# Altium PCB DCSupplyHub.PcbDoc
Units mm, origin at the board's own origin, x right, y up, seen from the top; angles counter-clockwise.
Board outline 81.6 x 57 mm, 2 copper layers (Top Layer, Bottom Layer), stack 1 mm thick; 118 components, 65 nets, 375 pads, 0 vias.
Unrouted connection lines stored in the file: 267.
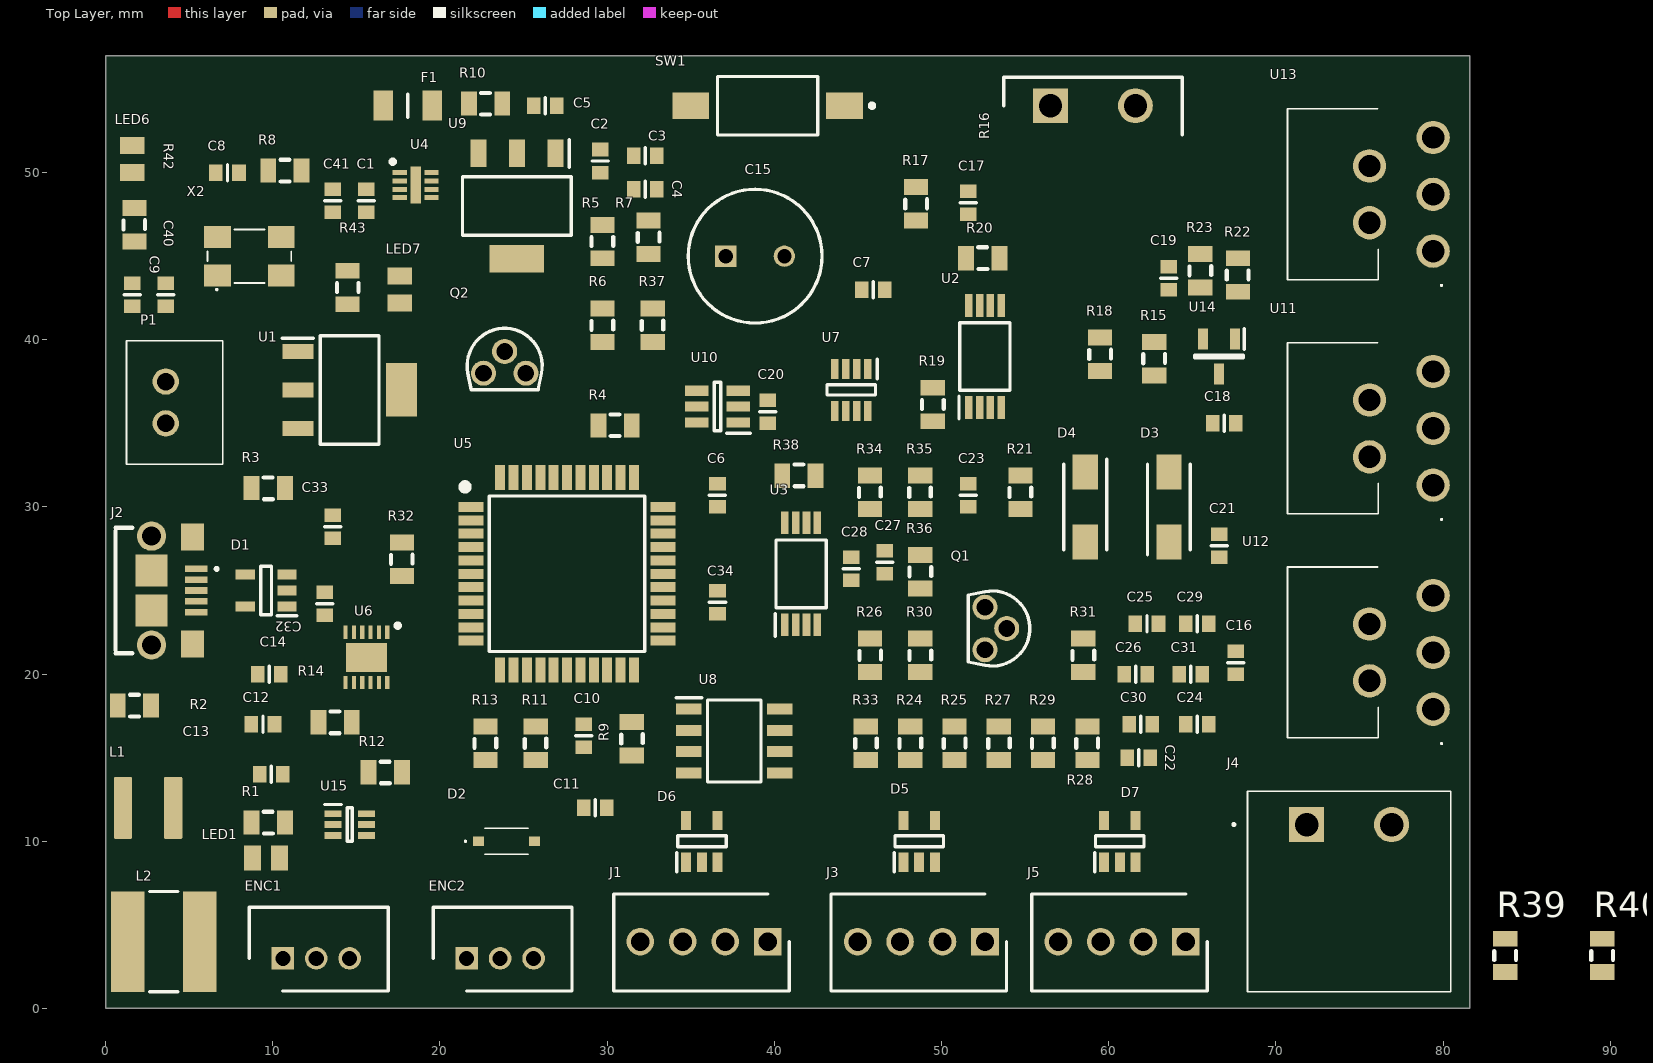
[diagram p0: Top Layer view]
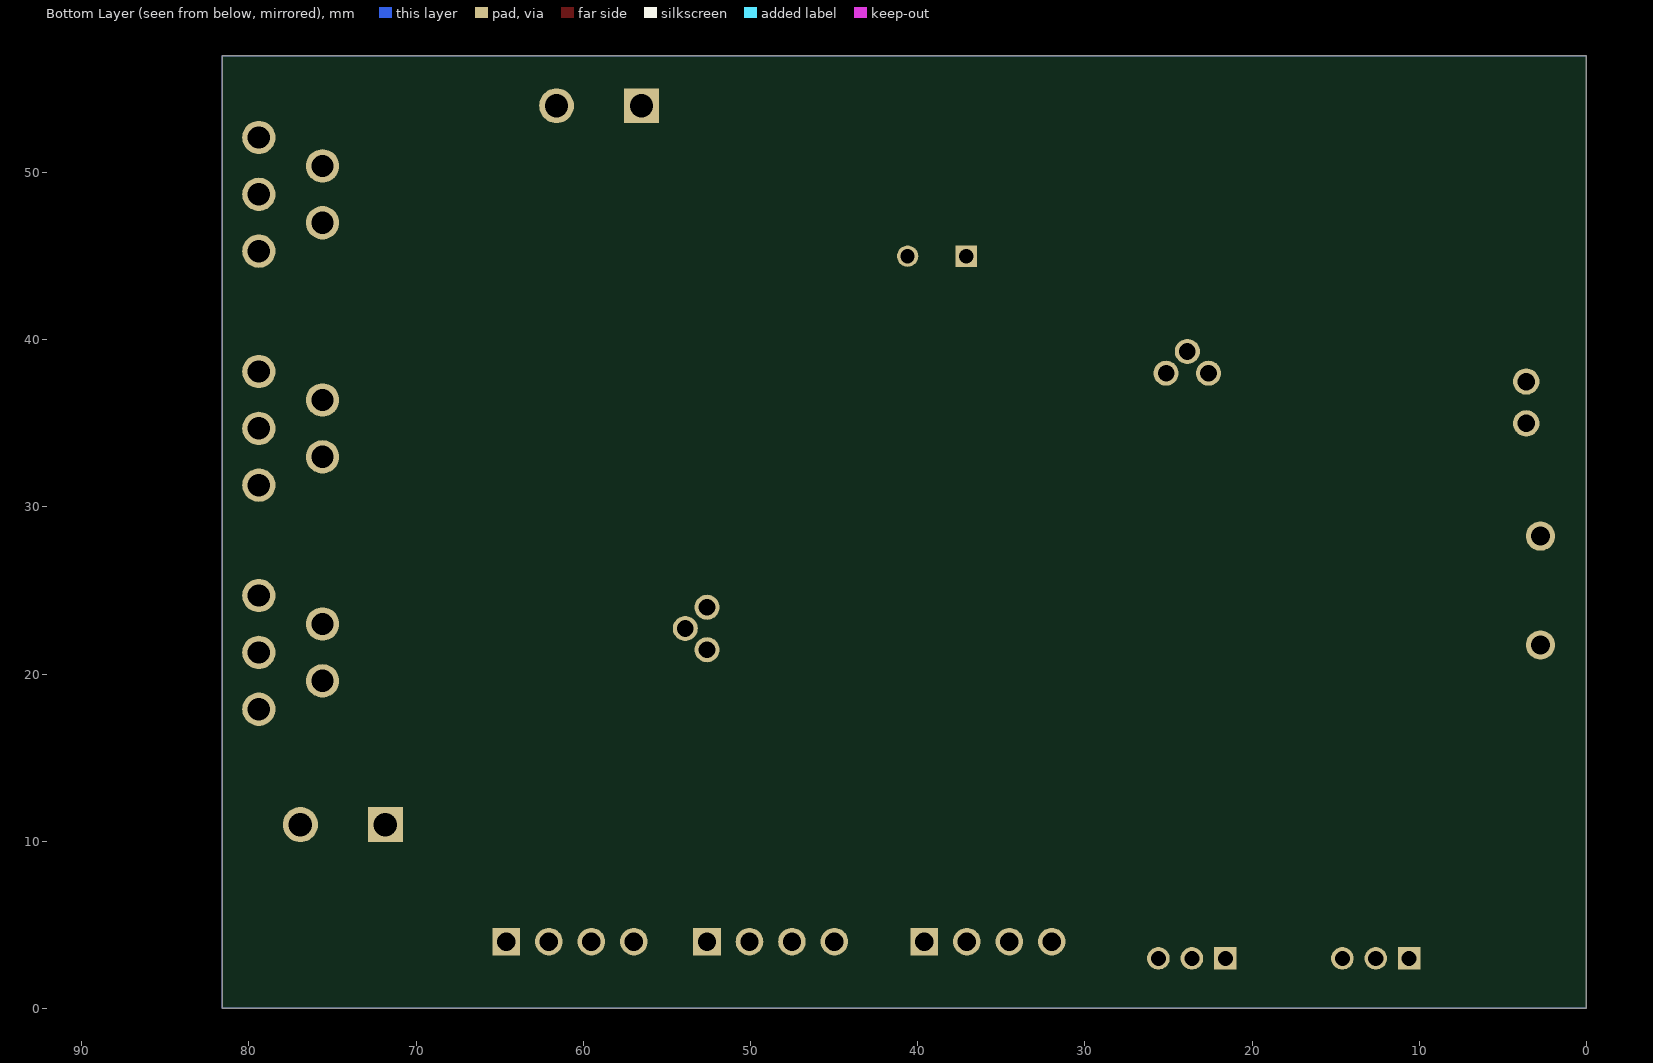
[diagram p1: Bottom Layer view, seen from below]

## Layer stack, top to bottom
Top Solder: solder mask 0.05, Solder Resist, Dk 4
Top Layer: signal copper 0.1
Dielectric 1: dielectric 0.8, FR-4, Dk 4.8
Bottom Layer: signal copper 0.1
Bottom Solder: solder mask 0.05, Solder Resist, Dk 4

## Board outline
0,0 81.6,0 81.6,57 0,57

## Design rules (kind name [scope] priority, off if disabled: settings)
AcuteAngle [All] p1: minimum=6.00000000000000E+0001 checktracksonly=FALSE
Clearance [All] p1: gap=0.2 ignorepadtopadclearanceinfootprint=TRUE
HoleSize [All] p1: absolutevalues=TRUE maxlimit=20 minlimit=0.15 maxpercent=80.000 minpercent=20.000
MinimumAnnularRing [All] p1: minimumring=0.125
MinimumSolderMaskSliver [All] p1: minsoldermaskwidth=0.15
PlaneConnect [All] p1: planeconnectstyle=Direct reliefexpansion=0.508 reliefentries=4 reliefconductorwidth=0.254 reliefairgap=0.254
PolygonConnect [All] p1: connectstyle=Direct reliefconductorwidth=0.254 reliefentries=4 polygonreliefangle="90 Angle" airgapwidth=0.254
RoutingVias [All] p1: holewidth=0.3 width=0.6 viastyle="Through Hole" minholewidth=0.2 minwidth=0.45 maxholewidth=10 maxwidth=5
SMDNeckDown [All] p1: percent=50.000
SilkToSolderMaskClearance [IsPad] p1: minsilkscreentomaskgap=0 clearancetoexposedcopper=TRUE
SolderMaskExpansion [All] p1: expansion=0.05 istentingtop=FALSE
UnRoutedNet [All] p1: checkbadconnections=TRUE
Width [All] p1: maxlimit=5 minlimit=0.1 preferedwidth=0.2 bottomlayer_minwidth=0.15 minimp=50.000000 maximp=50.000000 favimp=50.000000
25 further rules are at their usual default settings.

## Classes and differential pairs
component class PWM-DAC-PSU: C15 C16 C17 C18 C19 C20 C21 C22 C23 C24 C25 C26 C27 C28 C29 C30 C31 D3 D4 Q1 Q2 R15 R16 R17 R18 R19 R20 R21 R22 R23 R24 R25 R26 R27 R28 R29 R30 R31 R32 R33 R34 R35 R36 R37 R38 U2 U3 U7 U8 U10 U11 U12 U13 U14
component class DCDC-EPOT: C10 C11 C12 C13 C14 D2 L2 R11 R12 R13 R14 U6 U15

## Components (designator, comment, footprint, x,y, rotation, side; value= is the part's Value field where it differs from the comment)
C1 "Cap" Cap_0603 15.6,47.497 r270 top value=100nF
C2 "Cap" Cap_0603 29.6,51.503 r90 top value=100nF
C3 "Cap" Cap_0603 33.103,51 r0 top value=100nF
C4 "Cap" Cap_0603 33.103,49 r0 top value=100nF
C5 "Cap" Cap_0603 25.477,54 r180 top value=100nF
C6 "Cap" Cap_0603 36.6,31.503 r90 top value=100nF
C7 "Cap" Cap_0603 45.097,43 r180 top value=22uF
C8 "Cap" Cap_0603 8.103,50 r0 top value=10uF
C9 "Cap" Cap_0603 1.6,41.877 r270 top value=10uF
C10 "Cap" Cap_0603 28.6,17.123 r90 top value=2u2
C11 "Cap" Cap_0603 30.103,12 r0 top value=22uF
C12 "Cap" Cap_0603 8.6,17 r180 top value=100nF
C13 "Cap" Cap_0603 9.097,14 r180 top value=100nF
C14 "Cap" Cap_0603 10.6,20 r0 top value=22uF
C15 "35V 220uF" CAPPRD350W65D800H1300 37.1,45 r0 top
C16 "Cap" Cap_0603 67.6,19.877 r270 top value=100nF
C17 "Cap" Cap_0603 51.6,49 r90 top value=100nF
C18 "Cap" Cap_0603 66.097,35 r180 top value=100nF
C19 "Cap" Cap_0603 63.6,42.877 r270 top value=22uF
C20 "Cap" Cap_0603 39.6,34.877 r270 top value=100nF
C21 "Cap" Cap_0603 66.6,28.503 r90 top value=100nF
C22 "Cap" Cap_0603 62.6,15 r0 top value=100nF
C23 "Cap" Cap_0603 51.6,31.503 r90 top value=?uF
C24 "Cap" Cap_0603 66.103,17 r0 top value=10uF
C25 "Cap" Cap_0603 63.103,23 r0 top value=100nF
C26 "Cap" Cap_0603 60.797,20 r180 top value=100nF
C27 "Cap" Cap_0603 46.6,25.877 r270 top value=?uF
C28 "Cap" Cap_0603 44.6,25.497 r270 top value=?uF
C29 "Cap" Cap_0603 66.103,23 r0 top value=10uF
C30 "Cap" Cap_0603 61.097,17 r180 top value=100nF
C31 "Cap" Cap_0603 64.097,20 r180 top value=10uF
C32 "Cap" Cap_0603 13.1,23.397 r270 top value=100nF
C33 "Cap" Cap_0603 13.6,28 r270 top value=10uF
C34 "Cap" Cap_0603 36.6,23.497 r270 top value=10uF
C40 "Cap" Cap_0603 3.6,43.503 r90 top value=22pF
C41 "Cap" Cap_0603 13.6,49.123 r90 top value=22pF
D1 "CM1223-02SO" SOT95P280X145-5N 9.6,25 r180 top
D2 "BAT48ZFILM" BAT48ZFILM 23.974,10 r0 top
D3 "SK33A_R3G" DIOM5126X250N 63.6,30 r90 top
D4 "SK33A_R3G" DIOM5126X250N 58.6,30 r270 top
D5 "CM1223-02SO" SOT95P280X145-5N 48.665,10 r90 top
D6 "CM1223-02SO" SOT95P280X145-5N 35.665,10 r90 top
D7 "CM1223-02SO" SOT95P280X145-5N 60.665,10 r90 top
ENC1 "440054-3" SHDR3W50P0X200_1X3_800X470X635P 10.6,3 r0 top
ENC2 "440054-3" SHDR3W50P0X200_1X3_800X470X635P 21.6,3 r0 top
F1 "0685P9500-01" FUSC3216X83N 18.07,54 r180 top
J1 "61900411121" SHDR4W64P0X254_1X4_1020X580X1175P 39.6,4 r180 top
J2 "2013499-1" 2013499-1 0.6,25 r270 top
J3 "61900411121" SHDR4W64P0X254_1X4_1020X580X1175P 52.6,4 r180 top
J4 "1757242" 1757242 71.839,11 r0 top
J5 "61900411121" SHDR4W64P0X254_1X4_1020X580X1175P 64.6,4 r180 top
L1 "74404042330" "WE-LQS 4018" 2.541,12 r180 top value=33µH
L2 "SRN6045-2R2Y" SRN6045_1 3.473,4 r0 top
LED1 "Check Fuse" LED_SMD_0805_R 9.6,9 r180 top
LED6 "" LED_SMD_0805_R 1.6,50.81 r90 top
LED7 "GREEN" LED_SMD_0805_R 17.6,43 r90 top
P1 "B2B-XH-2__LF__SN_" B2BXH2LFSN 3.6,37.5 r270 top
Q1 "2N3904" LM431ACZ 52.6,24 r270 top
Q2 "2N3904" LM431ACZ 22.6,38 r0 top
R1 "Res1" RES_0805 9.6,11 r90 top value=18k
R2 "Res1" RES_0805 1.6,18 r90 top value=22K
R3 "Res1" RES_0805 9.6,31 r90 top value=22K
R4 "Res1" RES_0805 30.6,35 r270 top value=10k
R5 "Res1" RES_0805 29.6,46 r0 top value=33k
R6 "Res1" RES_0805 29.6,41 r0 top value=10k
R7 "Res1" RES_0805 32.6,46 r180 top value=18k
R8 "Res1" RES_0805 10.6,50 r90 top value=12k
R9 "Res1" RES_0805 31.6,16 r180 top value=18k
R10 "Res1" RES_0805 22.6,54 r90 top value=12k
R11 "Res1" RES_0805 25.6,16 r0 top value=10k
R12 "Res1" RES_0805 16.6,14 r90 top value=850R
R13 "Res1" RES_0805 22.6,16 r0 top value=2k2
R14 "Res1" RES_0805 13.6,17 r90 top value=10k
R15 "Res1" RES_0805 62.6,39 r0 top value="18k 0.1%"
R16 "PWR221T-30-1R00F" TO508P343X1041X1930-2P 56.52,54 r0 top
R17 "Res1" RES_0805 48.6,48 r180 top value=22k
R18 "Res1" RES_0805 59.6,39 r180 top value="18k 0.1%"
R19 "Res1" RES_0805 49.6,36 r180 top value=22k
R20 "Res1" RES_0805 52.6,45 r270 top value="18k 0.1%"
R21 "Res1" RES_0805 54.6,31 r0 top value="18k 0.1%"
R22 "Res1" RES_0805 67.6,44 r0 top value=10k
R23 "Res1" RES_0805 65.6,44 r180 top value=22k
R24 "Res1" RES_0805 48.251,15.746 r180 top value=100R
R25 "Res1" RES_0805 50.902,15.746 r180 top value="18k 0.1%"
R26 "Res1" RES_0805 45.854,21 r180 top value="1k 0.1%"
R27 "Res1" RES_0805 53.552,15.746 r180 top value="18k 0.1%"
R28 "Res1" RES_0805 58.6,16 r0 top value="18k 0.1%"
R29 "Res1" RES_0805 55.949,16 r0 top value="18k 0.1%"
R30 "Res1" RES_0805 48.854,21 r180 top value=1k
R31 "Res1" RES_0805 58.6,21 r180 top value=100R
R32 "Res1" RES_0805 17.6,27 r0 top value=1k
R33 "Res1" RES_0805 45.6,15.746 r180 top value=1k
R34 "Res1" RES_0805 45.6,31 r0 top value=1k
R35 "Res1" RES_0805 48.6,31 r0 top value=1k
R36 "Res1" RES_0805 48.854,26 r180 top value=1k
R37 "Res1" RES_0805 32.6,41 r0 top value=10k
R38 "Res1" RES_0805 41.6,32 r270 top value=1k
R39 "Res1" RES_0805 83.6,3.3 r0 top value=4.7k
R40 "Res1" RES_0805 89.4,3.3 r0 top value=4.7k
R42 "Res1" RES_0805 1.6,47 r0 top value=150R
R43 "Res1" RES_0805 14.6,43 r180 top value=65R
SW1 "EVQQ2D03W" TECO-FSMSMTR_V 39.6,54 r180 top
U1 "AZ1117IH-3.3TRG1" SOT230P700X180-4N 14.6,37 r0 top
U2 "LM358FV-GE2" SOP65P640X135-8N 52.6,39 r90 top
U3 "LM358FV-GE2" SOP65P640X135-8N 41.6,26 r90 top
U4 "LTC4365CDDB#PBF" SON50P200X300X80-9N-D 18.55,49.25 r0 top
U5 "" QFP80P1200X1200X120-44N 27.6,26 r0 top
U6 "MIC2253-06YML" SON50P300X300X90-13N-D 15.6,21 r270 top
U7 "INA219BIDCNT" SOT65P280X145-8N 44.6,37 r270 top
U8 "LM334M_NOPB" SOIC127P600X175-8N 37.6,16 r0 top
U9 "LD1117S50TR" SOT230P700X190-4N 24.6,48 r270 top
U10 "MCP4726" SOT95P270X145-6N 36.6,36 r180 top
U11 "LT3080ET#31PBF" LT3080ET31PBF 79.41,31.3 r90 top
U12 "LT3080ET#31PBF" LT3080ET31PBF 79.41,17.9 r90 top
U13 "LT3080ET#31PBF" LT3080ET31PBF 79.41,45.3 r90 top
U14 "MAX6018AEUR18+T" SOT95P237X112-3N 66.6,39 r270 top
U15 "MCP4017T-103E_LT" SOT65P210X110-6N 14.6,11 r0 top
X2 "ABM3C-16.000MHZ-D4Y-T" ABM3C16000MHZD4YT 8.6,45 r0 top

## Footprints (in the part's own frame and the unit in brackets; to place one, negate y for a bottom-side part, rotate by r counter-clockwise, add the part's x,y. Pads: shape width x height; smd on the part's side, far side on the other; paste and mask are expansions set on the pad)
1757242 [mm]
  rect 2.1x2.1 hole 1.4: 1(0,0)
  round 2.1 hole 1.4: 2(5.08,0)
  silkscreen extent -4.4,-10 8.62,2, body extent -3.58,-10 8.58,2, height 8.89
2013499-1 [mm]
  rect 0.4x1.35 smd: 1(-1.3,4.825) 2(-0.65,4.825) 3(0,4.825) 4(0.65,4.825) 5(1.3,4.825)
  rect 1.6x1.4 smd: 6(-3.2,4.6) 7(3.2,4.6)
  rect 1.9x1.9 smd: 8(-1.2,2.15) 9(1.2,2.15)
  round 1.75 hole 1.15: 10(-3.255,2.15) 11(3.255,2.15)
  silkscreen extent -3.75,0 3.75,6.09, body extent -3.97,-0.56 4.03,5.04, height 2.68
ABM3C16000MHZD4YT [mm]
  rect 1.6x1.3 smd: 1(-1.9,-1.15) 2(1.9,-1.15) 3(1.9,1.15) 4(-1.9,1.15)
  silkscreen extent -2.5,-2.05 2.5,1.6, body extent -2.57,-1.67 2.57,1.67, height 1.4
B2BXH2LFSN [mm]
  round 1.575 hole 1.05: 1(0,0) 2(2.5,0)
  silkscreen extent -2.45,-2.35 4.95,3.4, body extent -2.45,-3.36 4.95,3.39, height 7.01
BAT48ZFILM [mm]
  rect 0.65x0.57 smd: 1(-1.675,0) 2(1.675,0)
  silkscreen extent -2.5,-0.78 1.3,0.77, body extent -1.94,-0.77 1.94,0.77, height 1.55
Cap_0603 [mm]
  rect 0.81x0.99 smd: 1(-1.503,0) 2(-0.123,0)
  silkscreen extent -0.81,-0.48 -0.81,0.48, body extent -1.63,-0.41 0,0.41, height 0.95
CAPPRD350W65D800H1300 [mm]
  rect 1.275x1.275 hole 0.85: 1(0,0)
  round 1.275 hole 0.85: 2(3.5,0)
  silkscreen extent -2.25,-4 5.75,4, body extent -2.49,-4.25 6,4.25, height 13
DIOM5126X250N [mm]
  rect 2.1x1.5 smd: 1(-2.1,0) 2(2.1,0)
  silkscreen extent -2.85,-1.28 2.57,1.28, body extent -2.57,-1.28 2.57,1.28, height 2.5
FUSC3216X83N [mm]
  rect 1.17x1.8 smd: 1(-1.47,0) 2(1.47,0)
  silkscreen extent 0,-0.69 0,0.69
LED_SMD_0805_R [mm]
  rect 1.02x1.47 smd: 1(-0.81,0) 2(0.81,0)
  body extent -1,-0.62 1,0.63, height 1.1
LM431ACZ [mm]
  round 1.5 hole 1: 1(0,0) 2(1.27,1.3) 3(2.54,0)
  silkscreen extent -0.97,-1 3.51,2.68, body extent -1.39,-1.64 3.93,2.55, height 6.11
LT3080ET31PBF [mm]
  round 1.995 hole 1.33: 1(0,0) 2(1.7,3.81) 3(3.4,0) 4(5.1,3.81) 5(6.8,0)
  silkscreen extent -2.1,-0.55 8.51,8.71, body extent -1.71,-0.56 8.51,8.71, height 15.85
QFP80P1200X1200X120-44N [mm]
  rect 1.5x0.6 smd: 1(-5.75,4) 2(-5.75,3.2) 3(-5.75,2.4) 4(-5.75,1.6) 5(-5.75,0.8) 6(-5.75,0) 7(-5.75,-0.8) 8(-5.75,-1.6) 9(-5.75,-2.4) 10(-5.75,-3.2) 11(-5.75,-4) 23(5.75,-4) 24(5.75,-3.2) 25(5.75,-2.4) 26(5.75,-1.6) 27(5.75,-0.8) 28(5.75,0) 29(5.75,0.8) 30(5.75,1.6) 31(5.75,2.4) 32(5.75,3.2) 33(5.75,4)
  rect 0.6x1.5 smd: 12(-4,-5.75) 13(-3.2,-5.75) 14(-2.4,-5.75) 15(-1.6,-5.75) 16(-0.8,-5.75) 17(0,-5.75) 18(0.8,-5.75) 19(1.6,-5.75) 20(2.4,-5.75) 21(3.2,-5.75) 22(4,-5.75) 34(4,5.75) 35(3.2,5.75) 36(2.4,5.75) 37(1.6,5.75) 38(0.8,5.75) 39(0,5.75) 40(-0.8,5.75) 41(-1.6,5.75) 42(-2.4,5.75) 43(-3.2,5.75) 44(-4,5.75)
  silkscreen extent -6.3,-4.65 4.65,5.4
RES_0805 [mm]
  rect 1.45x0.95 smd: 1(0.127,-1.127) 2(0.127,0.873)
  silkscreen extent -0.53,-0.4 0.76,0.14, body extent -0.5,-1.15 0.75,0.9, height 0.5
SHDR3W50P0X200_1X3_800X470X635P [mm]
  rect 1.35x1.35 hole 0.9: 1(0,0)
  round 1.35 hole 0.9: 2(2,0) 3(4,0)
  silkscreen extent -2,-1.95 6.3,3.05, body extent -1.91,-1.6 6.09,3.1, height 6.05
SHDR4W64P0X254_1X4_1020X580X1175P [mm]
  rect 1.65x1.65 hole 1.1: 1(0,0)
  round 1.65 hole 1.1: 2(2.54,0) 3(5.08,0) 4(7.62,0)
  silkscreen extent -1.29,-2.85 9.21,2.95, body extent -1.29,-2.9 8.91,2.9, height 11.75
SOIC127P600X175-8N [mm]
  rect 1.525x0.65 smd: 1(-2.712,1.905) 2(-2.712,0.635) 3(-2.712,-0.635) 4(-2.712,-1.905) 5(2.712,-1.905) 6(2.712,-0.635) 7(2.712,0.635) 8(2.712,1.905)
  silkscreen extent -3.47,-2.45 1.6,2.58, body extent -3,-2.45 3,2.45, height 1.75
SON50P200X300X80-9N-D [mm]
  rect 0.85x0.3 smd: 1(-0.95,0.75) 2(-0.95,0.25) 3(-0.95,-0.25) 4(-0.95,-0.75) 5(0.95,-0.75) 6(0.95,-0.25) 7(0.95,0.25) 8(0.95,0.75)
  rect 0.61x2.2 smd: 9(0,0)
  silkscreen extent -1.5,1.28 -1.25,1.52, body extent -1.05,-1.5 1.05,1.5, height 0.8
SON50P300X300X90-13N-D [mm]
  rect 0.8x0.25 smd: 1(-1.5,1.25) 2(-1.5,0.75) 3(-1.5,0.25) 4(-1.5,-0.25) 5(-1.5,-0.75) 6(-1.5,-1.25) 7(1.5,-1.25) 8(1.5,-0.75) 9(1.5,-0.25) 10(1.5,0.25) 11(1.5,0.75) 12(1.5,1.25)
  rect 1.75x2.45 smd: 13(0,0)
  silkscreen extent -2.02,1.75 -1.78,2, body extent -1.55,-1.5 1.55,1.5, height 0.9
SOP65P640X135-8N [mm]
  rect 1.35x0.45 smd: 1(-3.05,0.975) 2(-3.05,0.325) 3(-3.05,-0.325) 4(-3.05,-0.975) 5(3.05,-0.975) 6(3.05,-0.325) 7(3.05,0.325) 8(3.05,0.975)
  silkscreen extent -3.72,-1.5 2.03,1.55, body extent -3.2,-1.5 3.2,1.5, height 1.35
SOT65P210X110-6N [mm]
  rect 1x0.4 smd: 1(-1,0.65) 2(-1,0) 3(-1,-0.65) 4(1,-0.65) 5(1,0) 6(1,0.65)
  silkscreen extent -1.5,-1 0.15,1.2, body extent -1.05,-1 1.05,1, height 1.1
SOT65P280X145-8N [mm]
  rect 1.2x0.45 smd: 1(-1.25,0.975) 2(-1.25,0.325) 3(-1.25,-0.325) 4(-1.25,-0.975) 5(1.25,-0.975) 6(1.25,-0.325) 7(1.25,0.325) 8(1.25,0.975)
  silkscreen extent -1.85,-1.45 0.3,1.55, body extent -1.41,-1.45 1.41,1.45, height 1.3
SOT95P237X112-3N [mm]
  rect 1.25x0.6 smd: 1(-1.05,0.95) 2(-1.05,-0.95) 3(1.05,0)
  silkscreen extent -1.67,-1.46 0.08,1.5, body extent -1.27,-1.46 1.27,1.46, height 1
SOT95P270X145-6N [mm]
  rect 1.4x0.6 smd: 1(-1.25,0.95) 2(-1.25,0) 3(-1.25,-0.95) 4(1.25,-0.95) 5(1.25,0) 6(1.25,0.95)
  silkscreen extent -1.95,-1.45 0.2,1.6, body extent -1.35,-1.45 1.35,1.45, height 1.45
SOT95P280X145-5N [mm]
  rect 1.15x0.6 smd: 1(-1.25,0.95) 2(-1.25,0) 3(-1.25,-0.95) 4(1.25,-0.95) 5(1.25,0.95)
  silkscreen extent -1.83,-1.45 0.32,1.5, body extent -1.4,-1.45 1.4,1.45, height 1.45
SOT230P700X180-4N [mm]
  rect 1.85x0.9 smd: 1(-3.1,2.3) 2(-3.1,0) 3(-3.1,-2.3)
  rect 1.85x3.2 smd: 4(3.1,0)
  silkscreen extent -4.03,-3.25 1.75,3.25
SOT230P700X190-4N [mm]
  rect 1.65x0.95 smd: 1(-3.15,2.3) 2(-3.15,0) 3(-3.15,-2.3)
  rect 1.65x3.25 smd: 4(3.15,0)
  silkscreen extent -3.98,-3.25 1.75,3.25, body extent -3.5,-3.25 3.5,3.25, height 1.9
SRN6045_1 [mm]
  rect 2.01x6 smd: 1(-2.15,0) 2(2.15,0)
  silkscreen extent -0.85,-3 0.85,3, body extent -3,-3 3,3, height 4.5
TECO-FSMSMTR_V [mm] "SMD, 2-Leads, Body 6x3.5mm, Pitch 9.19mm"
  rect 2.2x1.6 smd: 1(-4.595,0)
  rect 2.18x1.6 smd: 2(4.595,0)
  silkscreen extent -6.37,-1.75 3,1.75, body extent -4.98,-1.75 4.98,1.75, height 4.4
TO508P343X1041X1930-2P [mm]
  rect 2.085x2.085 hole 1.39: 1(0,0)
  round 2.085 hole 1.39: 2(5.08,0)
  silkscreen extent -2.79,-1.73 7.87,1.7, body extent -2.67,-1.73 7.75,1.7, height 18.8
"WE-LQS 4018" [mm] "SMD Power Inductor, 2-Leads, Body 4.0x4.0mm"
  rrect15% 1.1x3.7 smd: 1(-1.5,0) 2(1.5,0)
  body extent -2,-2 2,2, height 1.78

## Part data
C1 C2 C3 C4 C5 C6 C7 C8 C9 C10 C11 C12 C13 C14 C16 C17 C18 C19 C20 C21 C22 C23 C24 C25 C26 C27 C28 C29 C30 C31 C32 C33 C34 C40 C41: "Capacitor", LatestRevisionDate=17-Jul-2002, LatestRevisionNote="Re-released for DXP Platform.", PackageDescription="Radial Cap, Thru-Hole; 2 Leads; 0.3 in Pin Spacing", PackageReference=RAD-0.3, Published=8-Jun-2000, Publisher="Altium Limited"
C15: library part EEU-FR1V221BJ, "Capacitor Polarised", Manufacturer_Name=Panasonic, Mouser Part Number=667-EEU-FR1V221BJ, Arrow Part Number=EEU-FR1V221BJ, Arrow Price/Stock=https://www.arrow.com/en/products/eeufr1v221bj/panasonic?region=nac, Datasheet Link=https://www.farnell.com/datasheets/3629148.pdf, Height=13mm, Manufacturer_Part_Number=EEU-FR1V221BJ, Mouser Price/Stock=https://www.mouser.co.uk/ProductDetail/Panasonic/EEU-FR1V221BJ?qs=f9yNj16SXrJlLopqn4QBkw%3D%3D
D1 D5 D6 D7: "TVS Diode (Uni-directional)", Manufacturer_Name=onsemi, Mouser Part Number=748-CM1223-02SO, Datasheet Link=https://www.onsemi.com/pdf/datasheet/cm1223-d.pdf, Height=1.45mm, Manufacturer_Part_Number=CM1223-02SO, Mouser Price/Stock=https://www.mouser.co.uk/ProductDetail/onsemi/CM1223-02SO?qs=lLuKAerq7nnvVg3rEtIojA%3D%3D
D2: "Schottky Diode", Manufacturer_Name=STMicroelectronics, Mouser Part Number=511-BAT48ZFILM, Arrow Part Number=BAT48ZFILM, Arrow Price/Stock=https://www.arrow.com/en/products/bat48zfilm/stmicroelectronics?region=europe, Datasheet Link=https://altium.componentsearchengine.com/Datasheets/2/BAT48ZFILM.pdf, Height=1.45mm, Manufacturer_Part_Number=BAT48ZFILM, Mouser Price/Stock=https://www.mouser.co.uk/ProductDetail/STMicroelectronics/BAT48ZFILM?qs=jZi1jxfVU97drMZAC9JWhA%3D%3D
D3 D4: "Schottky Diode", Manufacturer_Name="Taiwan Semiconductor", Manufacturer_Part_Number="SK33A R3G", Mouser Part Number=821-SK33AR3G, Datasheet Link=https://eu.mouser.com/datasheet/2/395/SK32A%20SERIES_T1705-1140381.pdf, Height=2.5mm, Mouser Price/Stock=https://www.mouser.co.uk/ProductDetail/Taiwan-Semiconductor/SK33A-R3G?qs=u4fy%2FsgLU9MRgnm6RX6lAA%3D%3D
ENC1 ENC2: "Connector", Manufacturer_Name="TE Connectivity", Mouser Part Number=571-440054-3, Arrow Part Number=440054-3, Arrow Price/Stock=https://www.arrow.com/en/products/440054-3/te-connectivity?region=nac, ComponentLink1Description="Encoder Datasheet", ComponentLink1URL=https://www.farnell.com/datasheets/3750970.pdf, Datasheet Link=https://www.te.com/commerce/DocumentDelivery/DDEController?Action=srchrtrv&DocNm=440054&DocType=Customer+Drawing&DocLang=English&DocFormat=pdf&PartCntxt=440054-3, Height=6.35mm, Manufacturer_Part_Number=440054-3, Mouser Price/Stock=https://www.mouser.co.uk/ProductDetail/TE-Connectivity/440054-3?qs=JFPmFzpscO5ATC%252BmN3ka1Q%3D%3D
F1: "Fuse Chip Fast Acting 50A 32V SMD Solder Pad 1206 3.2 X 1.58 X 0.63mm Ceramic T/R", Manufacturer_Name="Bel Circuit Protection", Arrow Part Number=0685P9500-01, Arrow Price/Stock=https://www.arrow.com/en/products/0685p9500-01/bel-group?region=europe, ComponentLink1Description=Datasheet, ComponentLink1URL=https://www.belfuse.com/resources/datasheets/circuitprotection/ds-CP-0685P-series.pdf, Datasheet Link=https://www.arrow.com/en/products/0685p9500-01/bel-group, Geometry.Height=0.83mm, Manufacturer_Part_Number=0685P9500-01
J1 J3 J5: "Connector", Manufacturer_Name="Wurth Elektronik", Mouser Part Number=710-61900411121, Datasheet Link=https://katalog.we-online.de/em/datasheet/6190xx11121.pdf, Height=11.75mm, Manufacturer_Part_Number=61900411121, Mouser Price/Stock=https://www.mouser.co.uk/ProductDetail/Wurth-Elektronik/61900411121?qs=W%252B2sBeLta1Z79%252BA04MeSCQ%3D%3D
  J1 J3: ComponentLink1Description="LCD Datasheet", ComponentLink1URL=https://www.farnell.com/datasheets/3708797.pdf
  J5: ComponentLink1Description="USB A", ComponentLink1URL=https://www.te.com/usa-en/product-1932258-1.datasheet.pdf
J2: "Connector", Manufacturer_Name="TE Connectivity", Mouser Part Number=571-2013499-1, Arrow Part Number=2013499-1, Arrow Price/Stock=https://www.arrow.com/en/products/2013499-1/te-connectivity?region=nac, Datasheet Link=http://www.te.com/commerce/DocumentDelivery/DDEController?Action=showdoc&DocId=Customer+Drawing%7F2013499%7FB2%7Fpdf%7FEnglish%7FENG_CD_2013499_B2.pdf%7F2013499-1, Manufacturer_Part_Number=2013499-1, Mouser Price/Stock=https://www.mouser.co.uk/ProductDetail/TE-Connectivity/2013499-1?qs=TL6PIybY3BOLK37GbUYdng%3D%3D
J4: "Connector", Manufacturer_Name="Phoenix Contact", Mouser Part Number=651-1757242, Arrow Part Number=1757242, Arrow Price/Stock=https://www.arrow.com/en/products/1757242/phoenix-contact?region=nac, Datasheet Link=http://www.phoenixcontact.com/de/produkte/1757242/pdf, Height=8.72mm, Manufacturer_Part_Number=1757242, Mouser Price/Stock=https://www.mouser.co.uk/ProductDetail/Phoenix-Contact/1757242?qs=uD%2FdkN7XIa3Ejiz9qDxlzw%3D%3D
L1: library part CMP-006-00018-3, "WE-LQS SMD Power Inductor, L=33 µH", Tolerance=20%, ComponentLink1Description="Manufacturer URL", ComponentLink1URL=http://www.we-online.com, ComponentLink2Description=Datasheet, ComponentLink2URL=http://katalog.we-online.de/pbs/datasheet/74404042330.pdf, Pins=2
L2: "Inductor", Manufacturer_Name=Bourns, Mouser Part Number=652-SRN6045-2R2Y, Arrow Part Number=SRN6045-2R2Y, Arrow Price/Stock=https://www.arrow.com/en/products/srn6045-2r2y/bourns?region=nac, Datasheet Link=https://www.bourns.com/docs/Product-Datasheets/SRN6045.pdf, Manufacturer_Part_Number=SRN6045-2R2Y, Mouser Price/Stock=https://www.mouser.co.uk/ProductDetail/Bourns/SRN6045-2R2Y?qs=opBjA1TV903BwygMAGUj4g%3D%3D
LED1 LED6 LED7: library part LED2, "Typical RED, GREEN, YELLOW, AMBER GaAs LED", LatestRevisionDate=17-Jul-2002, LatestRevisionNote="Re-released for DXP Platform.", PackageDescription="SM LED; 2 Flat Leads", PackageReference=3.2X1.6X1.1, PackageVersion=Feb-2002, Published=8-Jun-2000, Publisher="Altium Limited"
P1: "Connector", Arrow Part Number="B2B-XH-2 (LF)(SN)", Manufacturer_Name="JST (JAPAN SOLDERLESS TERMINALS)", Arrow Price/Stock=https://www.arrow.com/en/products/b2b-xh-2-lf-sn/jst-manufacturing?region=europe, Datasheet Link=http://uk.rs-online.com/web/p/products/1755297, Height=7mm, Manufacturer_Part_Number="B2B-XH-2 (LF)(SN)"
Q1 Q2: library part 2N3904BU, "Transistor BJT NPN", Manufacturer_Name=onsemi, Mouser Part Number=512-2N3904BU, Arrow Part Number=2N3904BU, Arrow Price/Stock=https://www.arrow.com/en/products/2n3904bu/on-semiconductor?region=europe, Datasheet Link=http://www.onsemi.com/pub/Collateral/2N3904-D.pdf, Height=5.33mm, Manufacturer_Part_Number=2N3904BU, Mouser Price/Stock=https://www.mouser.co.uk/ProductDetail/onsemi-Fairchild/2N3904BU?qs=or4AE2qAS%252Bd0Jdpn%2F8ktKg%3D%3D
R1 R2 R3 R4 R5 R6 R7 R8 R9 R10 R11 R12 R13 R14 R15 R17 R18 R19 R20 R21 R22 R23 R24 R25 R26 R27 R28 R29 R30 R31 R32 R33 R34 R35 R36 R37 R38 R39 R40 R42 R43: "Resistor", LatestRevisionDate=17-Jul-2002, LatestRevisionNote="Re-released for DXP Platform.", PackageDescription="Axial Device, Thru-Hole; 2 Leads; 0.3 in Pin Spacing", PackageReference=AXIAL-0.3, Published=8-Jun-2000, Publisher="Altium Limited"
R16: "Resistor", Manufacturer_Name=Bourns, Mouser Part Number=652-PWR221T-30-1R00F, Arrow Part Number=PWR221T-30-1R00F, Arrow Price/Stock=https://www.arrow.com/en/products/pwr221t-30-1r00f/bourns, Datasheet Link=https://www.mouser.com/datasheet/2/54/pwr221t-30-777826.pdf, Height=3.43mm, Manufacturer_Part_Number=PWR221T-30-1R00F, Mouser Price/Stock=https://www.mouser.co.uk/ProductDetail/Bourns/PWR221T-30-1R00F?qs=XYAu1o%252BHdOJGOBAldPrG1w%3D%3D
SW1: library part CMP-2000-07501-1, "FSMSM Push Button Switch, 50 mA, -35 to 85 degC, 2-Pin SMD, RoHS, Tape and Reel", Case\/Package=SMD/SMT, Contact Current Rating=50mA, Contact Resistance=100mOhm, Manufacturer="TE Connectivity", Max Operating Temperature=85degC, Max Voltage Rating (DC)=12V, Min Operating Temperature=-35degC, Operating Force=180gf, Package Description="2-Pin Surface Mount Device, Body 6 x 3.5 mm, Pitch 9.19 mm", Package Quantity=1800, Package Reference=FSMSMTR, Voltage Rating (DC)=24V, Actuator Length=1.07mm, Actuator Material=Polyamide, Contact Material=Brass, Contact Plating=Silver, Current Rating=50mA, Datasheet URL=http://www.te.com/commerce/DocumentDelivery/DDEController?Action=showdoc&DocId=Customer+Drawing%7F1437566-3%7FC2%7Fpdf%7FEnglish%7FENG_CD_1437566-3_C2_1437566_3_1_c.dwg.pdf%7F1437566-4, Datasheet Version="Rev. C2, 08/2014", Electrical Life=20000Cycles, ELV=Compliant, Illumination Type=Illuminated, Lead Free=LeadFree, Manufacturer URL=http://www.te.com/, Mechanical Life=20000Cycles, Mount=SurfaceMount, Mounting Technology=SurfaceMount, Orientation=Straight, Packaging=TapeandReel, REACH SVHC=Unknown, RoHSCompliant=true, Switch Travel=0.25mm, Termination=GullWing, Throw Configuration=SPST
U1: "LDO Voltage Regulators LDO BJT HiCurr 1.35A 10Hz to 10KHz", Manufacturer_Name="Diodes Inc.", Mouser Part Number=621-AZ1117IH-3.3TRG1, Arrow Part Number=AZ1117IH-3.3TRG1, Arrow Price/Stock=https://www.arrow.com/en/products/az1117ih-3.3trg1/diodes-incorporated?region=nac, ComponentLink1Description=Datasheet, ComponentLink1URL=https://www.diodes.com/assets/Datasheets/AZ1117I.pdf, Datasheet Link=http://www.mouser.com/ds/2/115/AZ1117-776390.pdf, Geometry.Height=1.8mm, Manufacturer_Part_Number=AZ1117IH-3.3TRG1, Mouser Price/Stock=https://www.mouser.co.uk/ProductDetail/Diodes-Incorporated/AZ1117IH-3.3TRG1?qs=cpo3%2FpBou2jnS4SxLgAVoA%3D%3D
U2: library part TI-LM358-8, ComponentLink1Description=Datasheet, ComponentLink1URL=https://www.ti.com/lit/ds/symlink/lm358.pdf?ts=1699359399522&ref_url=https%253A%252F%252Fwww.ti.com%252Fproduct%252FLM358%253Futm_source%253Dgoogle%2526utm_medium%253Dcpc%2526utm_campaign%253Dasc-null-null-GPN_EN-cpc-evm-google-wwe_cons%2526utm_content%253DLM358%2526ds_k%253DLM358%2BDatasheet%2526DCM%253Dyes%2526gclid%253DEAIaIQobChMI5uKEhe-xggMVJz4GAB1MywkTEAAYASAAEgJG8PD_BwE%2526gclsrc%253Daw.ds
U3: library part TI-LM358-8, Supplier Part Number 1=1716341, ComponentLink1Description=Datasheet, ComponentLink1URL=https://www.ti.com/lit/ds/symlink/lm358.pdf?ts=1699359399522&ref_url=https%253A%252F%252Fwww.ti.com%252Fproduct%252FLM358%253Futm_source%253Dgoogle%2526utm_medium%253Dcpc%2526utm_campaign%253Dasc-null-null-GPN_EN-cpc-evm-google-wwe_cons%2526utm_content%253DLM358%2526ds_k%253DLM358%2BDatasheet%2526DCM%253Dyes%2526gclid%253DEAIaIQobChMI5uKEhe-xggMVJz4GAB1MywkTEAAYASAAEgJG8PD_BwE%2526gclsrc%253Daw.ds, Supplier 1=Rs
U4: "Integrated Circuit", Manufacturer_Name="Analog Devices", Mouser Part Number=584-LTC4365CDDB#PBF, ComponentLink1Description=Datasheet, ComponentLink1URL=https://www.analog.com/media/en/technical-documentation/data-sheets/LTC4365.pdf, Datasheet Link=http://cds.linear.com/docs/en/datasheet/4365fa.pdf, Height=0.8mm, Manufacturer_Part_Number=LTC4365CDDB#PBF, Mouser Price/Stock=https://www.mouser.com/Search/Refine.aspx?Keyword=584-LTC4365CDDB%23PBF
U5: library part ATMEGA32U4-AU, "MCU AVR 32K FLASH 16MHZ 44-TQFP Atmel ATMEGA32U4-AU, 8bit AVR Microcontroller, 16MHz, 1 kB, 32 kB Flash, 44-Pin TQFP", Manufacturer_Name=Microchip, Mouser Part Number=556-ATMEGA32U4-AU, Arrow Part Number=ATMEGA32U4-AU, Arrow Price/Stock=https://www.arrow.com/en/products/atmega32u4-au/microchip-technology?region=nac, ComponentLink1Description=Datasheet, ComponentLink1URL=https://ww1.microchip.com/downloads/en/DeviceDoc/Atmel-7766-8-bit-AVR-ATmega16U4-32U4_Datasheet.pdf, Datasheet=https://ww1.microchip.com/downloads/en/DeviceDoc/Atmel-7766-8-bit-AVR-ATmega16U4-32U4_Datasheet.pdf, Datasheet Link=http://www.atmel.com/images/atmel-7766-8-bit-avr-atmega16u4-32u4_summary.pdf, Geometry.Height=1.2mm, Manufacturer_Part_Number=ATMEGA32U4-AU, Mouser Price/Stock=https://www.mouser.co.uk/ProductDetail/Microchip-Technology/ATMEGA32U4-AU?qs=SSucg2PyLi7mKWjHIsNJ3w%3D%3D
U6: "Integrated Circuit", Manufacturer_Name=Microchip, Datasheet Link=http://uk.rs-online.com/web/p/products/7092273, Height=0.9mm, Manufacturer_Part_Number=MIC2253-06YML
U7: "Integrated Circuit", Manufacturer_Name="Texas Instruments", Mouser Part Number=595-INA219BIDCNT, Arrow Part Number=INA219BIDCNT, Arrow Price/Stock=https://www.arrow.com/en/products/ina219bidcnt/texas-instruments?region=nac, Datasheet Link=http://www.ti.com/lit/ds/symlink/ina219.pdf, Height=1.45mm, Manufacturer_Part_Number=INA219BIDCNT, Mouser Price/Stock=https://www.mouser.co.uk/ProductDetail/Texas-Instruments/INA219BIDCNT?qs=1WmUhT%2FVMIMmEKxVjzYikA%3D%3D
U8: "Integrated Circuit", Arrow Part Number=LM334M/NOPB, Manufacturer_Name="Texas Instruments", Mouser Part Number=926-LM334M/NOPB, Arrow Price/Stock=https://www.arrow.com/en/products/lm334mnopb/texas-instruments?region=nac, Datasheet Link=http://www.ti.com/lit/ds/symlink/lm334.pdf, Height=1.75mm, Manufacturer_Part_Number=LM334M/NOPB, Mouser Price/Stock=https://www.mouser.co.uk/ProductDetail/Texas-Instruments/LM334M-NOPB?qs=X1J7HmVL2ZGVqL5LPYoDQw%3D%3D
U9: "Integrated Circuit", Manufacturer_Name=STMicroelectronics, Mouser Part Number=511-LD1117S50, Arrow Part Number=LD1117S50TR, Arrow Price/Stock=https://www.arrow.com/en/products/ld1117s50tr/stmicroelectronics?region=nac, Datasheet Link=https://datasheet.lcsc.com/szlcsc/STMicroelectronics-LD1117S50TR_C134077.pdf, Height=1.9mm, Manufacturer_Part_Number=LD1117S50TR, Mouser Price/Stock=https://www.mouser.co.uk/ProductDetail/STMicroelectronics/LD1117S50TR?qs=eQN2Ig5lfEwsh0kTXN%2FkTg%3D%3D
U10: library part MCP4725A0T-E_CH, "Integrated Circuit", Arrow Part Number=MCP4725A0T-E/CH, Manufacturer_Name=Microchip, Mouser Part Number=579-MCP4725A0TECH, Arrow Price/Stock=https://www.arrow.com/en/products/mcp4725a0t-ech/microchip-technology?region=nac, Datasheet Link=http://ww1.microchip.com/downloads/en/DeviceDoc/22039d.pdf, Height=1.45mm, Manufacturer_Part_Number=MCP4725A0T-E/CH, Mouser Price/Stock=https://www.mouser.co.uk/ProductDetail/Microchip-Technology/MCP4725A0T-E-CH?qs=vkMqrgFpRajeQECZ3goc0A%3D%3D
U11 U12 U13: "Integrated Circuit", Manufacturer_Name="Analog Devices", Mouser Part Number=584-LT3080ET#31PBF, Arrow Part Number=LT3080ET#31PBF, Arrow Price/Stock=https://www.arrow.com/en/products/lt3080et31pbf/analog-devices?region=nac, Datasheet Link=https://www.analog.com/media/en/technical-documentation/data-sheets/3080fc.pdf, Height=15.748mm, Manufacturer_Part_Number=LT3080ET#31PBF, Mouser Price/Stock=https://www.mouser.co.uk/ProductDetail/Analog-Devices/LT3080ET31PBF?qs=hVkxg5c3xu%252BqtsodQH9qig%3D%3D
U14: "Integrated Circuit", Manufacturer_Name="Analog Devices", Mouser Part Number=700-MAX6018AEUR18T, Datasheet Link=https://datasheets.maximintegrated.com/en/ds/MAX6018-MAX6018B.pdf, Height=1.12mm, Manufacturer_Part_Number=MAX6018AEUR18+T, Mouser Price/Stock=https://www.mouser.co.uk/ProductDetail/Maxim-Integrated/MAX6018AEUR18%2bT?qs=GxOUx7aO6nxTHpj7gtPQaw%3D%3D
U15: "Integrated Circuit", Arrow Part Number=MCP4017T-103E/LT, Manufacturer_Name=Microchip, Mouser Part Number=579-MCP4017T103E/LT, Arrow Price/Stock=https://www.arrow.com/en/products/mcp4017t-103elt/microchip-technology?region=nac, Datasheet Link=https://datasheet.datasheetarchive.com/originals/distributors/Datasheets-DGA14/624353.pdf, Height=1.1mm, Manufacturer_Part_Number=MCP4017T-103E/LT, Mouser Price/Stock=https://www.mouser.co.uk/ProductDetail/Microchip-Technology/MCP4017T-103E-LT?qs=%2FsslhGPpiOQYx8130JNsXw%3D%3D
X2: "16MHz Â±30ppm Crystal 18pF 50 Ohms 4-SMD, No Lead", Package="SMD-4 Abracon", Availability=Unavailable, ComponentLink1Description=Datasheet, ComponentLink1URL=https://www.mouser.ee/datasheet/2/3/abm3c-1775120.pdf, MF=Abracon, MP=ABM3C-16.000MHZ-D4Y-T, Price=None, SnapEDA_Link=https://www.snapeda.com/parts/ABM3C-16.000MHZ-D4Y-T/Abracon%20LLC/view-part/463692/?ref=snap, Supplier 1="Arrow Electronics", Supplier Part Number 1=ABM3C-16.000MHZ-D4Y-T

## Nets (pads, with @x,y where several pads share a name; then routed paths per layer and width w, separated by ;. In a path a pad name is that pad's centre, name@x,y a point inside that pad or via, vN(x,y) a via of type N, cw(c..) or ccw(c..) an arc to the next point about the centre after c; other vN are vias at no path point)
3.3V: C7.2 C13.1 C18.1 C20.1 R22.1 R43.1 U1.2 U7.4 U10.3 U15.1
+5: C3.2 C4.2 C5.2 C9.1 C33.2 C34.2 D1.5 D5.5 D6.5 D7.5 J1.4 J3.4 J5.4 R4.1 R39.2 R40.2 R42.1 U5.2 U5.14 U5.24 U5.34 U5.44 U9.2 U9.4
+36V: C2.1 C10.1 L1.2 L2.1 R5.2 R7.2 R9.2 U6.10
ADC-SUPPLY: R5.1 R6.2 U5.40
ADC-VOUT: C22.1 R28.1 R29.1 R31.2 R33.2 U5.41
CL_CP: R15.2 R38.1 U2.7
D+: D1.4 R2.1 U5.4
D-: D1.3 R3.1 U5.3
ENC1A: ENC1.1 U5.20
ENC1B: ENC1.3 U5.21
ENC2A: ENC2.1 U5.25
ENC2B: ENC2.3 U5.22
GND: C1.2 C2.2 C3.1 C4.1 C5.1 C6.2 C7.1 C8.1 C9.2 C10.2 C11.2 C12.2 C13.2 C14.1 C15.1 C16.2 C18.2 C19.2 C20.2 C21.2 C22.2 C23.1 C24.2 C25.2 C26.1 C27.2 C28.2 C29.2 C30.1 C31.2 C32.1 C40.1 C41.1 D1.2 D4.2 D5.2 D6.2 D7.2 ENC1.2 ENC2.2 J1.3 J3.3 J5.3 LED6.2 LED7.2 Q1.3 Q2.3 R6.1 R8.1 R10.1 R13.2 R21.1 R23.2 R24.1 R26.1 R33.1 R35.1 SW1.1 U1.1 U2.4 U3.4 U4.1 U4.9 U5.5 U5.15 U5.23 U5.35 U5.43 U6.4 U6.5 U6.6 U6.9 U7.3 U7.7 U7.8 U8.1 U9.1 U10.2 U14.3 U15.2 U15.5 X2.2 X2.4
LT3080_SET: D3.2 D4.1 J4.1 R25.2 R27.2 U8.4 U11.2 U12.2 U13.2
NetC1_1: C1.1 F1.2 L1.1 LED1.2 R1.2
NetC6_1: C6.1 R9.1 R10.2 U9.3
NetC8_2: C8.2 R7.1 R8.2 U1.3
NetC12_1: C12.1 U6.2
NetC14_2: C14.2 R14.2
NetC17_1: C17.1 R17.1 U7.1
NetC17_2: C17.2 R19.1 U7.2
NetC19_1: C19.1 R22.2 R23.1 U14.1
NetC23_2: C23.2 R32.1 R35.2 R36.1
NetC27_1: C27.1 R36.2 U3.6
NetC28_1: C28.1 R38.2 U3.5 U5.39
NetC32_2: C32.2 J2.5
NetC33_1: C33.1 J2.1
NetC34_1: C34.1 U5.7
NetD2_1: D2.1 L2.2 U6.7 U6.8
NetD7_3: D7.3 J5.1
NetD7_4: D7.4 J5.2
NetF1_1: F1.1 U4.6
NetJ2_2: J2.2 R3.2
NetJ2_3: J2.3 R2.2
NetJ4_2: J4.2 R28.2 R29.2
NetLED1_1: LED1.1 R1.1
NetLED6_1: LED6.1 R42.2
NetLED7_1: LED7.1 R43.2
NetP1_+: U4.4
NetQ1_1: Q1.1 R30.2 R31.1
NetQ1_2: Q1.2 R34.2
NetQ2_1: Q2.1 U5.27
NetQ2_2: Q2.2 R37.2
NetR11_2: R11.2 R12.1 R13.1 U6.3
NetR12_2: R12.2 U15.6
NetR14_1: R14.1 U6.12
NetR15_1: R15.1 R18.2 U2.6
NetR18_1: R18.1 U2.1 U2.2
NetR24_2: R24.2 U8.2 U8.3 U8.6 U8.7
NetR25_1: R25.1 R26.2 R27.1 U3.2
NetR30_1: R30.1 U3.1
NetR32_2: R32.2 U5.26
NetR34_1: R34.1 R37.1 U3.7
NetU5_37: U5.37 U6.11
NetU5_42: U5.42 U10.6 U14.2
RESET: R4.2 SW1.2 U5.13
SCL: D5.4 D6.4 J1.2 J3.2 R40.1 U5.18 U7.5 U10.5 U15.3
SDA: D5.3 D6.3 J1.1 J3.1 R39.1 U5.19 U7.6 U10.4 U15.4
SUPPLY_OUT: C31.1 U11.3 U12.3 U13.3
U2B_IN: R16.2 R20.2 R21.2 U2.5
V+: C11.1 C15.2 C16.1 C26.2 D2.2 R11.1 R16.1 R17.2 R20.1 U2.8 U3.8 U11.4 U12.4 U13.4
V_IN_LT: C21.1 C25.1 C30.2 D3.1 R19.2 U2.3 U11.5 U12.5 U13.5
VSET: U3.3 U10.1
XTAL1: C40.2 U5.17 X2.1
XTAL2: C41.2 U5.16 X2.3
pads on no net: C24.1 C29.1 D1.1 D5.1 D6.1 D7.1 J2.4 J2.6 J2.7 J2.8 J2.9 J2.10 J2.11 P1.1 P1.2 U1.4 U4.2 U4.3 U4.5 U4.7 U4.8 U5.1 U5.6 U5.8 U5.9 U5.10 U5.11 U5.12 U5.28 U5.29 U5.30 U5.31 U5.32 U5.33 U5.36 U5.38 U6.1 U6.13 U8.5 U8.8 U11.1 U12.1 U13.1

## Polygon pours and split planes (outlines as drawn)
no net on Bottom Layer "NONET_L02_P000" (solid, shelved, pour order 0): 0,0 81.6,0 81.6,57 0,57